# Altium PCB Roby-Eva.PcbDoc (part 1 of 2)
Units mil, origin at the board's own origin, x right, y up, seen from the top; angles counter-clockwise.
Board outline 3740.16 x 2519.69 mil, 2 copper layers (Top Layer, Bottom Layer); 61 components, 152 nets, 350 pads, 159 vias.
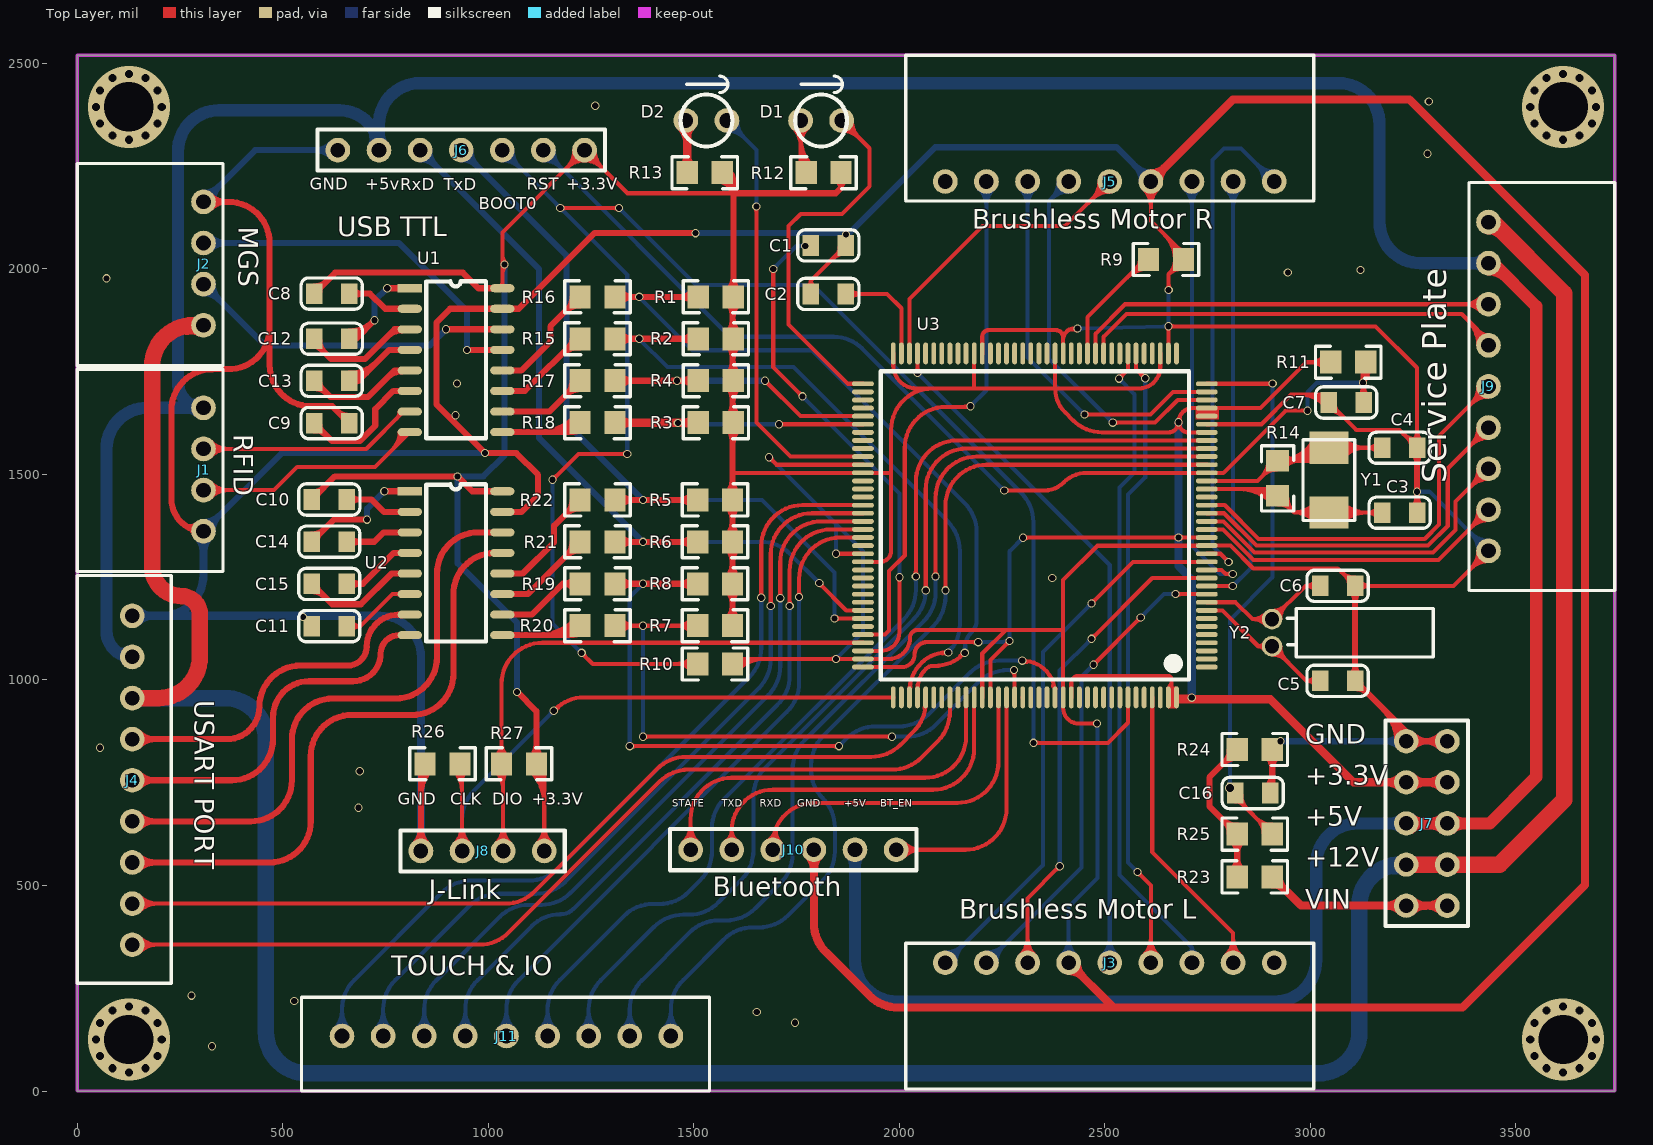
[diagram p0: Top Layer view]
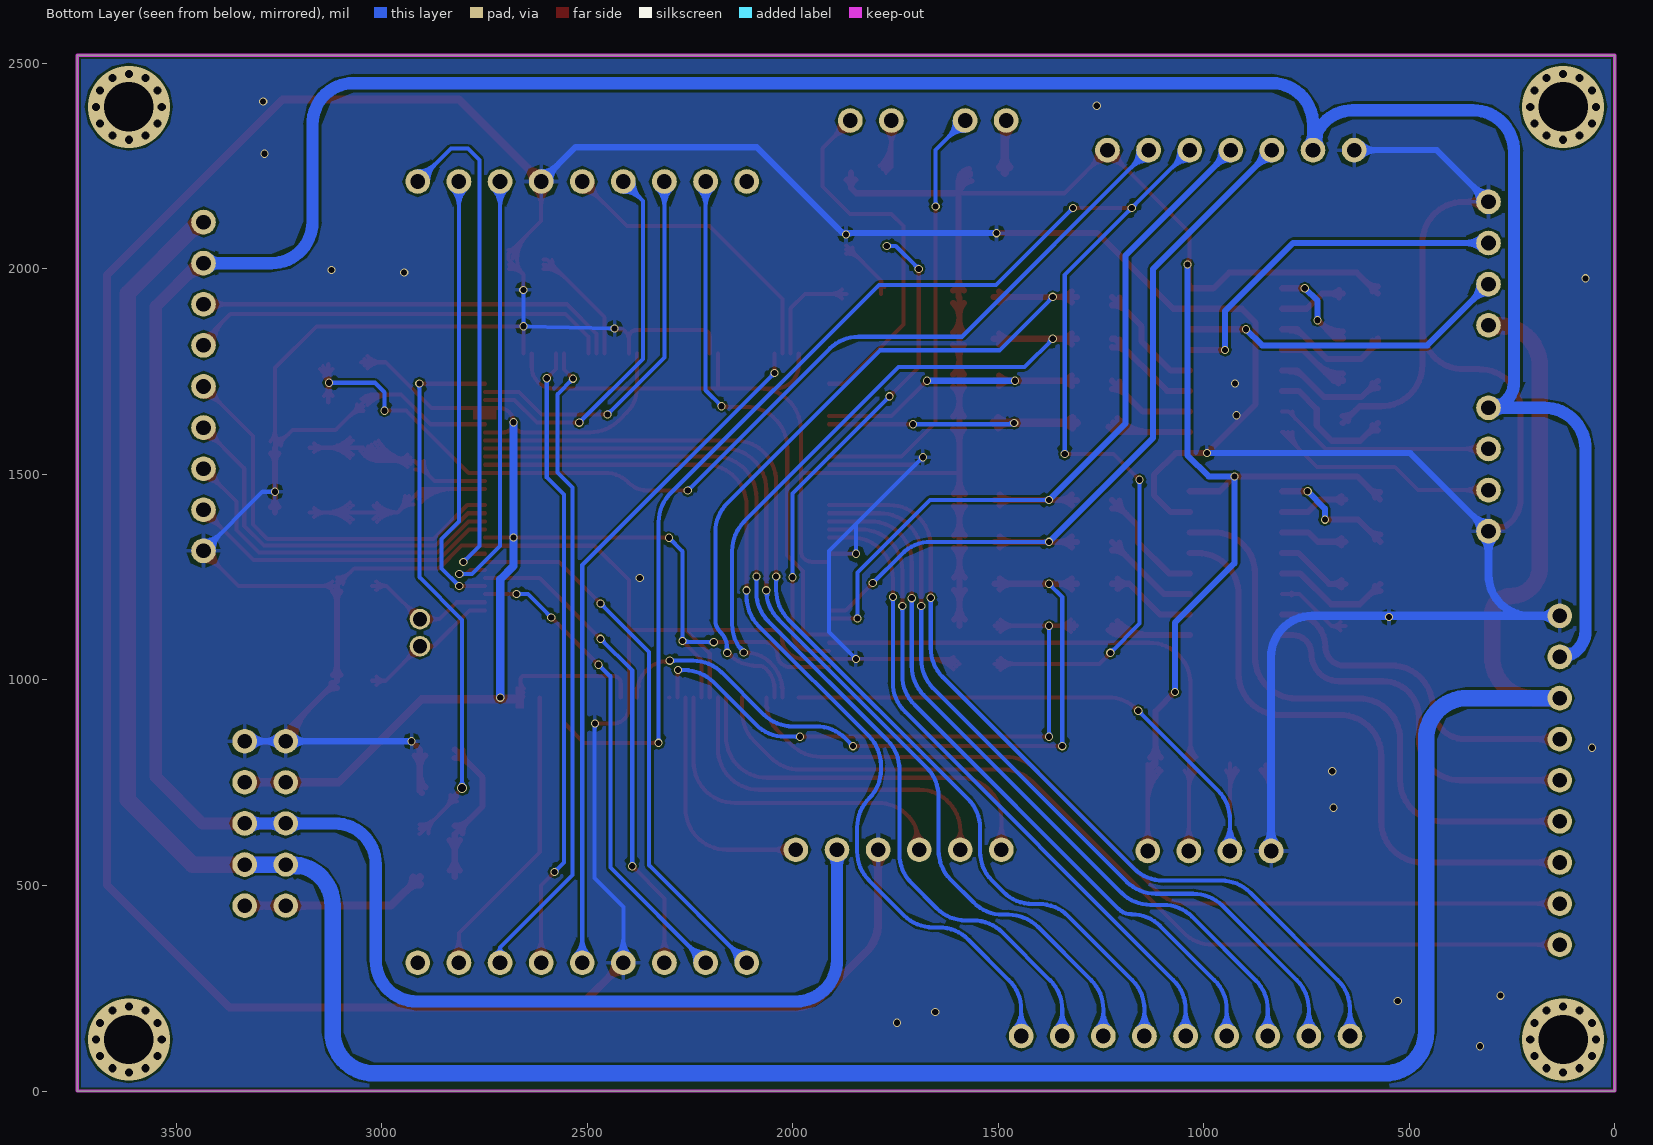
[diagram p1: Bottom Layer view, seen from below]
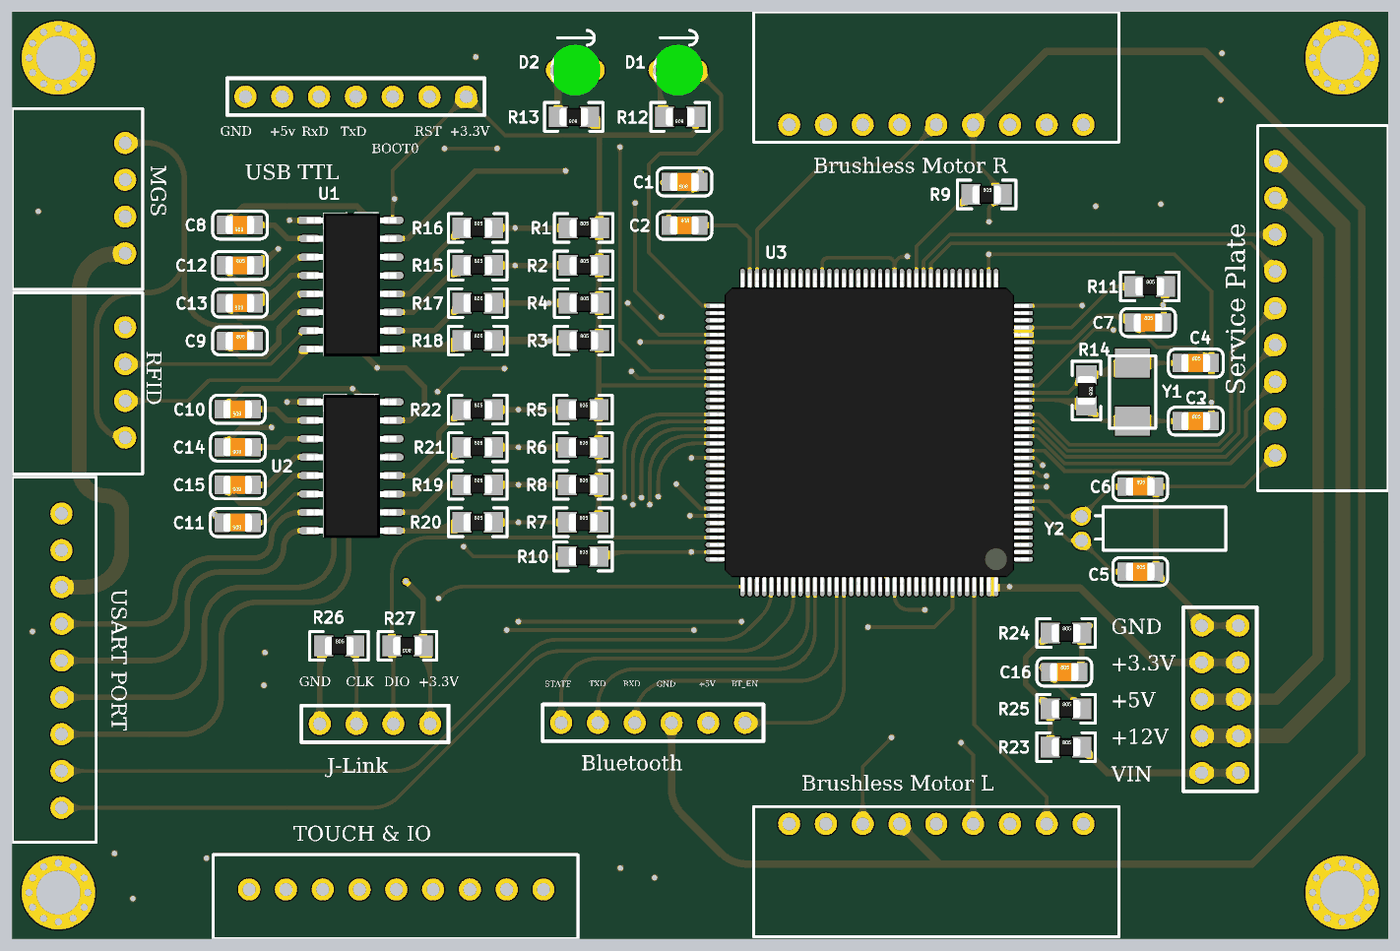
[diagram p3: 3D render of the assembled board from above, using the file's embedded part models]

## Layer stack, top to bottom
Top Layer: signal copper 1.4
Dielectric: dielectric 12.6, FR-4, Dk 4.8
Bottom Layer: signal copper 1.4

## Board outline
0,0 3740.16,0 3740.16,2519.69 0,2519.69

## Design rules (kind name [scope] priority, off if disabled: settings)
Clearance [All] p1: gap=5
ComponentClearance [All] p1: gap=5 collisioncheckmode=3 verticalgap=5 showdistances=FALSE
PolygonConnect [All] p1: connectstyle=Relief reliefconductorwidth=10 reliefentries=4 polygonreliefangle="90 Angle" airgapwidth=10
RoutingVias [All] p1: holewidth=28 width=50 viastyle="Through Hole" minholewidth=12 minwidth=15 maxholewidth=28 maxwidth=50
SolderMaskExpansion [All] p1: expansion=4
Width [All] p1: maxlimit=100 minlimit=10 preferedwidth=10
27 further rules are at their usual default settings.

## Components (designator, comment, footprint, x,y, rotation, side; value= is the part's Value field where it differs from the comment)
C1 "贴片电容0805" 0805C 1827,2057 r180 top
C2 "贴片电容0805" 0805C 1827.1,1939 r0 top
C3 "贴片电容0805" 0805C 3217,1407 r0 top
C4 "贴片电容0805" 0805C 3217,1565 r0 top
C5 "贴片电容0805" 0805C 3066,998 r0 top
C6 "贴片电容0805" 0805C 3066,1229 r0 top
C7 "贴片电容0805" 0805C 3087,1675 r0 top
C8 "贴片电容0805" 0805C 619,1940 r180 top
C9 "贴片电容0805" 0805C 619,1624.94 r0 top
C10 "贴片电容0805" 0805C 613.1,1439 r180 top
C11 "贴片电容0805" 0805C 613,1130.94 r180 top
C12 "贴片电容0805" 0805C 619.1,1830.31 r0 top
C13 "贴片电容0805" 0805C 619,1727.62 r180 top
C14 "贴片电容0805" 0805C 613,1336.31 r180 top
C15 "贴片电容0805" 0805C 613,1233.62 r180 top
C16 "贴片电容0805" 0805C 2859.5,725 r0 top
D1 "LED_DIP" LED_DIP 1809.5,2361 r0 top
D2 "LED_DIP" LED_DIP 1530.5,2361 r0 top
J1 "XH2.54-4P-L" XH2.54-4P-L 307.09,1362 r90 top
J2 "XH2.54-4P-L" XH2.54-4P-L 307.09,1863 r90 top
J3 "XH2.54-9P-L" XH2.54-9P-L 2511.74,312.09 r180 top
J4 "XH2.54-9P-D" XH2.54-9P-D 133.86,1156 r270 top
J5 "XH2.54-9P-L" XH2.54-9P-L 2511.74,2212.6 r0 top
J6 "CON7" HDR1X7H 634,2289 r90 top
J7 "CON 2x5" "CON 2X5" 3333,451 r180 top
J8 "CON4" HDR1X4H 836,584 r90 top
J9 "XH2.54-9P-L" XH2.54-9P-L 3433.07,1714 r270 top
J10 "CON6" HDR1X6H 1492,587 r90 top
J11 "XH2.54-9P-D" XH2.54-9P-D 644,133.86 r0 top
R1 "贴片电阻0805" 0805R 1511,1932 r0 top
R2 "贴片电阻0805" 0805R 1511,1829.98 r0 top
R3 "贴片电阻0805" 0805R 1511,1625.94 r0 top
R4 "贴片电阻0805" 0805R 1511,1727.96 r0 top
R5 "贴片电阻0805" 0805R 1509,1438 r0 top
R6 "贴片电阻0805" 0805R 1509,1335.98 r0 top
R7 "贴片电阻0805" 0805R 1509,1131.94 r0 top
R8 "贴片电阻0805" 0805R 1509,1233.96 r0 top
R9 "贴片电阻0805" 0805R 2606,2023 r0 top
R10 "贴片电阻0805" 0805R 1509,1039 r0 top
R11 "贴片电阻0805" 0805R 3049.4,1773 r0 top
R12 "贴片电阻0805" 0805R 1858,2234 r180 top
R13 "贴片电阻0805" 0805R 1569,2234 r180 top
R14 "贴片电阻0805" 0805R 2920,1533 r270 top
R15 "贴片电阻0805" 0805R 1223,1829.98 r0 top
R16 "贴片电阻0805" 0805R 1223,1932 r0 top
R17 "贴片电阻0805" 0805R 1223,1727.96 r0 top
R18 "贴片电阻0805" 0805R 1223,1625.94 r0 top
R19 "贴片电阻0805" 0805R 1223,1233.96 r0 top
R20 "贴片电阻0805" 0805R 1223,1131.94 r0 top
R21 "贴片电阻0805" 0805R 1223,1335.98 r0 top
R22 "贴片电阻0805" 0805R 1223,1438 r0 top
R23 "贴片电阻0805" 0805R 2821.89,521 r0 top
R24 "贴片电阻0805" 0805R 2821.89,831 r0 top
R25 "贴片电阻0805" 0805R 2821.89,625 r0 top
R26 "贴片电阻0805" 0805R 846,796 r0 top
R27 "贴片电阻0805" 0805R 1117,796 r180 top
U1 "MAX232" SOP16 809,1953 r0 top
U2 "MAX232" SOP16 809,1459 r0 top
U3 "STM32F407" LQFP144 2332,1376 r180 top
Y1 "CRYSAL_SOP_2" CRYSAL_SOP_2 3044.99,1565 r270 top
Y2 "CRYSAL_DIP_MINI" CRYSAL_DIP_MINI 3085.5,1119 r270 top

## Footprints (in the part's own frame and the unit in brackets; to place one, negate y for a bottom-side part, rotate by r counter-clockwise, add the part's x,y. Pads: shape width x height; smd on the part's side, far side on the other; paste and mask are expansions set on the pad)
0805C [mil]
  rect 40x50 smd: 1(-42.5,0) 2(42.5,0)
  silkscreen extent -75,-38 75,38, body extent -39,-25 39,25, height 30
0805R [mil]
  rect 52x56 smd: 1(0,0) 2(85,0)
  silkscreen extent -37,-39 122,39, body extent 3,-25 82,25, height 30
"CON 2X5" [mm]
  round 1.524 hole 0.9: 1(0,0) 2(0,-2.54) 3(0,-5.08) 4(0,-7.62) 5(0,-10.16)
  round 1.5 hole 0.9: 6(2.54,-10.16) 7(2.54,-7.62) 8(2.54,-5.08) 9(2.54,-2.54) 10(2.54,0)
  silkscreen extent -1.27,-11.43 3.81,1.27, body extent -1.27,-11.43 3.81,1.27, height 10
CRYSAL_DIP_MINI [mil] "晶振 小"
  round 50 hole 35: 1(-29,-179) 2(37,-179)
  silkscreen extent -55,-142 63,213, body extent -55,-189 63,212, height 122
CRYSAL_SOP_2 [mm]
  rect 2x2.4 smd: 1(0,0) 2(4,0)
  silkscreen extent -0.5,-1.6 4.5,1.6, body extent -0.48,-1.57 4.5,1.6, height 1.2
HDR1X4H [mil]
  round 60 hole 35.43: 1(0,0) 2(0,-100) 3(0,-200) 4(0,-300)
  silkscreen extent -50,-350 50,50, body extent -50,-350 50,50, height 394
HDR1X6H [mil]
  round 60 hole 35.43: 1(0,0) 2(0,-100) 3(0,-200) 4(0,-300) 5(0,-400) 6(0,-500)
  silkscreen extent -50,-550 50,50, body extent -50,-550 50,50, height 394
HDR1X7H [mil]
  round 60 hole 35.43: 1(0,0) 2(0,-100) 3(0,-200) 4(0,-300) 5(0,-400) 6(0,-500) 7(0,-600)
  silkscreen extent -50,-650 50,50, body extent -50,-650 50,50, height 394
LED_DIP [mil]
  round 60 hole 35.43: 1(-50,0) 2(50,0)
  silkscreen extent -63,-63 63,108, body extent -59,-69 69,69, height 197
LQFP144 [mm]
  oval 1.35x0.3 smd: 1(-10.563,8.75) 2(-10.563,8.25) 3(-10.562,7.75) 4(-10.563,7.25) 5(-10.562,6.75) 6(-10.562,6.25) 7(-10.562,5.75) 8(-10.563,5.25) 9(-10.563,4.75) 10(-10.563,4.25) 11(-10.562,3.75) 12(-10.562,3.25) 13(-10.562,2.75) 14(-10.562,2.25) 15(-10.562,1.75) 16(-10.562,1.25) 17(-10.562,0.75) 18(-10.562,0.25) 19(-10.562,-0.25) 20(-10.562,-0.75) 21(-10.562,-1.25) 22(-10.562,-1.75) 23(-10.562,-2.25) 24(-10.562,-2.75) 25(-10.563,-3.25) 26(-10.562,-3.75) 27(-10.562,-4.25) 28(-10.563,-4.75) 29(-10.563,-5.25) 30(-10.563,-5.75) 31(-10.563,-6.25) 32(-10.563,-6.75) 33(-10.562,-7.25) 34(-10.562,-7.75) 35(-10.562,-8.25) 36(-10.563,-8.75) 73(10.688,-8.75) 74(10.688,-8.25) 75(10.688,-7.75) 76(10.688,-7.25) 77(10.688,-6.75) 78(10.688,-6.25) 79(10.688,-5.75) 80(10.688,-5.25) 81(10.688,-4.75) 82(10.688,-4.25) 83(10.688,-3.75) 84(10.688,-3.25) 85(10.688,-2.75) 86(10.688,-2.25) 87(10.688,-1.75) 88(10.688,-1.25) 89(10.688,-0.75) 90(10.688,-0.25) 91(10.688,0.25) 92(10.688,0.75) 93(10.688,1.25) 94(10.688,1.75) 95(10.688,2.25) 96(10.688,2.75) 97(10.688,3.25) 98(10.688,3.75) 99(10.688,4.25) 100(10.688,4.75) 101(10.688,5.25) 102(10.688,5.75) 103(10.688,6.25) 104(10.688,6.75) 105(10.688,7.25) 106(10.688,7.75) 107(10.688,8.25) 108(10.688,8.75)
  oval 0.3x1.35 smd: 37(-8.688,-10.625) 38(-8.187,-10.625) 39(-7.687,-10.625) 40(-7.187,-10.625) 41(-6.687,-10.625) 42(-6.187,-10.625) 43(-5.687,-10.625) 44(-5.187,-10.625) 45(-4.687,-10.625) 46(-4.187,-10.625) 47(-3.687,-10.625) 48(-3.187,-10.625) 49(-2.687,-10.625) 50(-2.187,-10.625) 51(-1.687,-10.625) 52(-1.187,-10.625) 53(-0.687,-10.625) 54(-0.187,-10.625) 55(0.313,-10.625) 56(0.813,-10.625) 57(1.313,-10.625) 58(1.813,-10.625) 59(2.313,-10.625) 60(2.813,-10.625) 61(3.313,-10.625) 62(3.813,-10.625) 63(4.313,-10.625) 64(4.813,-10.625) 65(5.313,-10.625) 66(5.813,-10.625) 67(6.313,-10.625) 68(6.813,-10.625) 69(7.313,-10.625) 70(7.813,-10.625) 71(8.313,-10.625) 72(8.813,-10.625) 109(8.813,10.625) 110(8.313,10.625) 111(7.813,10.625) 112(7.313,10.625) 113(6.812,10.625) 114(6.313,10.625) 115(5.813,10.625) 116(5.312,10.625) 117(4.812,10.625) 118(4.313,10.625) 119(3.813,10.625) 120(3.313,10.625) 121(2.813,10.625) 122(2.313,10.625) 123(1.813,10.625) 124(1.313,10.625) 125(0.813,10.625) 126(0.313,10.625) 127(-0.187,10.625) 128(-0.687,10.625) 129(-1.187,10.625) 130(-1.687,10.625) 131(-2.187,10.625) 132(-2.687,10.625) 133(-3.187,10.625) 134(-3.688,10.625) 135(-4.187,10.625) 136(-4.687,10.625) 137(-5.188,10.625) 138(-5.687,10.625) 139(-6.187,10.625) 140(-6.687,10.625) 141(-7.187,10.625) 142(-7.687,10.625) 143(-8.188,10.625) 144(-8.688,10.625)
  silkscreen extent -9.46,-9.53 9.59,9.52, body extent -10.94,-11 11.06,11, height 1.6
SOP16 [mm]
  rect 1.5x0.5 smd: 1(0,0)
  oval 1.5x0.5 smd: 2(0,-1.27) 3(0,-2.54) 4(0,-3.81) 5(0,-5.08) 6(0,-6.35) 7(0,-7.62) 8(0,-8.89) 9(5.715,-8.89) 10(5.715,-7.62) 11(5.715,-6.35) 12(5.715,-5.08) 13(5.715,-3.81) 14(5.715,-2.54) 15(5.715,-1.27) 16(5.715,0)
  silkscreen extent 1.02,-9.27 4.7,0.43, body extent -0.21,-9.4 5.97,0.5, height 1.7
XH2.54-4P-L [mil]
  round 60 hole 35.43: 1(0,0) 2(100,0) 3(200,0) 4(300,0)
  silkscreen extent -98,-47 394,307, body extent -96,-11 396,304, height 224
XH2.54-9P-D [mil]
  round 60 hole 35.43: 1(0,0) 2(100,0) 3(200,0) 4(300,0) 5(400,0) 6(500,0) 7(600,0) 8(700,0) 9(800,0)
  silkscreen extent -98,-134 894,94
XH2.54-9P-L [mil] "2.54"
  round 60 hole 35.43: 1(-400,0) 2(-300,0) 3(-200,0) 4(-100,0) 5(0,0) 6(100,0) 7(200,0) 8(300,0) 9(400,0)
  silkscreen extent -496,-47 496,307, body extent -494,-10 494,305, height 224

## Via types
v1: diameter 20, hole 15, Top Layer to Bottom Layer, 106 vias
v2: diameter 19.68, hole 19.68, Top Layer to Bottom Layer, 48 vias
v3: diameter 200, hole 120, Top Layer to Bottom Layer, 4 vias
v4: diameter 25, hole 20, Top Layer to Bottom Layer, 1 vias

## Nets (pads, with @x,y where several pads share a name; then routed paths per layer and width w, separated by ;. In a path a pad name is that pad's centre, name@x,y a point inside that pad or via, vN(x,y) a via of type N, cw(c..) or ccw(c..) an arc to the next point about the centre after c; other vN are vias at no path point)
+3.3V: C8.2 C10.2 J6.7 J7.4 J7.7 J8.4 R1.2 R2.2 R3.2 R4.2 R5.2 R6.2 R7.2 R8.2 R11.1 R12.1 R13.1 R27.1 U1.16 U2.16 U3.17 U3.30 U3.32 U3.33 U3.39 U3.52 U3.62 U3.72 U3.84 U3.95 U3.108 U3.121 U3.131 U3.143 U3.144 | length 13562.4
  Top Layer w10: U1.16@1030.58,1956.42 ccw(c1022.31,1964.69) 1034,1964.69 ccw(c1045.69,1964.69) U1.16@1037.42,1956.42 ; U1.16@1034,1953 1034,2089 J6.7@1234,2289 1339,2184 1596,2184 ; 1034,1986.86 cw(c1063.14,1986.86) v1@1042.54,2007.46 ; 1034,2035.14 ccw(c1063.14,2035.14) v1@1042.54,2014.54 ; R27.1@1102.15,779.15 cw(c1020.43,697.43) 1136,697.43 ; R27.1@1109.22,786.22 cw(c1044.57,721.57) 1136,721.57 ; R27.1@1116.29,793.29 cw(c1068.72,745.72) 1136,745.72 ; J8.4@1118.32,601.68 ccw(c1075.64,644.36) 1136,644.36 ccw(c1196.36,644.36) J8.4@1153.68,601.68 ; R27.1@1123.36,800.36 cw(c1092.86,769.86) R27.1@1136,769.86 ; J8.4@1125.39,594.61 ccw(c1099.79,620.21) 1136,620.21 ccw(c1172.21,620.21) J8.4@1146.61,594.61 ; J8.4@1136,584 R27.1@1136,796 ; J6.7@1209,2289 cw(c1148.64,2289) 1191.32,2246.32 cw(c1234,2203.64) 1234,2264 cw(c1234,2203.64) 1276.68,2246.32 cw(c1319.36,2289) J6.7@1259,2289 ; J6.7@1219,2289 cw(c1182.79,2289) 1208.39,2263.39 cw(c1234,2237.79) 1234,2274 cw(c1234,2237.79) 1259.61,2263.39 cw(c1285.21,2289) J6.7@1249,2289 ; 1594,1495 cw(c1602.95,1495) 1602.95,1503.95 U3.84@1911.23,1503.95 1980,1503.95 ; U3.108@1911.23,1031.51 2006.51,1031.51 ccw(c2006.51,1062) 2037,1062 cw(c2067,1062) 2067,1092 v1(2192,1092) ; U3.95@1911.23,1287.42 1953.42,1287.42 ccw(c1953.42,1314) 1980,1314 1980,1503.95 ; U3.72@1985.05,1794.31 1985.05,1765.95 ccw(c2042,1765.95) 2042,1709 2080,1709 ; U3.62@2181.9,1794.31 2181.9,1709 ; v1@2188.46,1088.46 ccw(c2179.93,1079.93) 2179.93,1092 ccw(c2179.93,1104.07) v1@2188.46,1095.54 ; U3.121@2221.27,957.69 2221.27,1048.27 v1(2268,1095) ; v1@2263,1095 cw(c2250.93,1095) 2259.46,1086.46 cw(c2268,1077.93) v1@2268,1090 ; v1@2301,1346.47 v1(2679,1346.47) U3.17@2747.85,1346.47 ; v1@2304.54,1342.46 cw(c2314.21,1332.79) 2314.21,1346.47 ; v1@2304.54,1349.54 ccw(c2311.93,1356.93) 2311.93,1346.47 ; U3.52@2378.75,1794.31 2378.75,1709 ; U3.131@2418.12,957.69 2418.12,992.12 cw(c2436,992.12) 2436,1010 2652,1010 cw(c2652,1000) 2662,1000 2662,969.72 ccw(c2674.03,969.72) U3.144@2674.03,957.69 ; U3.39@2634.66,1794.31 2634.66,1761.66 cw(c2582,1761.66) 2582,1709 2378.75,1709 ; U3.143@2653.7,979 ccw(c2633.67,999.03) 2662,999.03 ; U3.143@2654.33,979.27 ccw(c2654.26,987) 2662,987 ; U3.143@2654.43,969.27 ccw(c2654.36,976.91) 2662,976.91 ; U3.143@2654.52,959.27 ccw(c2654.45,966.82) 2662,966.82 ; v1@2674.67,1624.5 cw(c2664.22,1618.46) 2675.88,1615.34 cw(c2687.54,1612.22) v1@2681.5,1622.67 ; v1@2675.46,1342.94 ccw(c2666.93,1334.4) 2666.93,1346.47 ccw(c2666.93,1358.54) v1@2675.46,1350.01 ; v1@2676.5,1622.67 cw(c2670.46,1612.22) 2682.12,1615.34 cw(c2693.78,1618.46) v1@2683.33,1624.5 ; v1@2676.5,1631.33 ccw(c2670.46,1641.78) 2682.12,1638.66 ccw(c2693.78,1635.54) v1@2683.33,1629.5 ; v1@2682.54,1342.94 cw(c2691.07,1334.4) 2691.07,1346.47 cw(c2691.07,1358.54) v1@2682.54,1350.01 ; U3.30@2747.85,1602.38 2703.62,1602.38 cw(c2703.62,1627) v1(2679,1627) ; U3.32@2747.85,1641.75 U3.33@2747.85,1661.43 ; R11.1@3034.55,1758.15 ccw(c2998.7,1722.3) 2998.7,1773 ccw(c2998.7,1823.7) R11.1@3034.55,1787.85 ; R11.1@3041.62,1765.22 ccw(c3022.84,1746.44) 3022.84,1773 ccw(c3022.84,1799.56) R11.1@3041.62,1780.78 ; R11.1@3049.4,1773 2990,1773 2878.43,1661.43 U3.33@2747.85,1661.43 ; 1980,1503.95 1980,1609 cw(c2080,1609) 1985.05,1640.38 cw(c2080,1609) 2080,1709 ; 2080,1709 2181.9,1709 ; 2181.9,1709 2378.75,1709 ; 2378.75,1709 ccw(c2460.24,1709) 2402.62,1651.38 2422.33,1631.67 ccw(c2493.04,1702.38) 2493.04,1602.38 2654.38,1602.38 ccw(c2654.38,1627) v1(2679,1627) ; v1(2679,1627) cw(c2713.43,1627) 2713.43,1661.43 U3.33@2747.85,1661.43
  Top Layer w15: C10.2@570.6,1439 626.6,1495 v1(925,1495) 961,1459 U2.16@1034,1459 ; C10.2@570.6,1456.5 ccw(c570.6,1498.75) 600.48,1468.87 ; C8.2@576.5,1940 627.5,1991 938,1991 976,1953 U1.16@1034,1953 ; C8.2@576.5,1957.5 ccw(c576.5,1999.75) 606.37,1969.87 ; C10.2@583.1,1444 cw(c601.21,1444) C10.2@588.41,1456.8 ; C8.2@589,1945 cw(c607.11,1945) C8.2@594.3,1957.8 ; v1(1070,971) 1117,924 R27.1@1117,796 ; R27.1@1103.92,811.08 ccw(c1072.34,842.66) 1117,842.66 ccw(c1161.66,842.66) R27.1@1130.08,811.08 ; R13.1@1565.51,2213.83 cw(c1558.42,2176.93) 1596,2176.93 ; R13.1@1568.34,2228.56 cw(c1561.91,2195.08) 1596,2195.08 ; R13.1@1569,2234 1596,2207 ; R13.1@1571.17,2243.29 cw(c1565.4,2213.24) 1596,2213.24 ; R13.1@1572.81,2213.9 cw(c1578.04,2189.04) 1596,2207 ; R7.2@1580.92,1147.02 ccw(c1549.34,1178.6) 1594,1178.6 ccw(c1638.66,1178.6) R7.2@1607.08,1147.02 ; R8.2@1580.92,1218.88 cw(c1549.34,1187.29) 1594,1187.29 cw(c1638.66,1187.29) R8.2@1607.08,1218.88 ; R8.2@1580.92,1249.04 ccw(c1549.34,1280.62) 1594,1280.62 ccw(c1638.66,1280.62) R8.2@1607.08,1249.04 ; R6.2@1580.92,1320.9 cw(c1549.34,1289.32) 1594,1289.32 cw(c1638.66,1289.32) R6.2@1607.08,1320.9 ; R6.2@1580.92,1351.06 ccw(c1549.34,1382.64) 1594,1382.64 ccw(c1638.66,1382.64) R6.2@1607.08,1351.06 ; R5.2@1580.92,1422.92 cw(c1549.34,1391.34) 1594,1391.34 cw(c1638.66,1391.34) R5.2@1607.08,1422.92 ; R5.2@1580.92,1453.08 ccw(c1549.34,1484.66) 1594,1484.66 ccw(c1638.66,1484.66) R5.2@1607.08,1453.08 ; R3.2@1582.92,1610.86 cw(c1556.16,1584.1) 1594,1584.1 ; R3.2@1582.92,1641.02 ccw(c1556.16,1667.77) 1594,1667.77 ; R4.2@1582.92,1712.88 cw(c1556.16,1686.12) 1594,1686.12 ; R4.2@1582.92,1743.04 ccw(c1556.16,1769.79) 1594,1769.79 ; R2.2@1582.92,1814.9 cw(c1556.17,1788.14) 1594,1788.14 ; R2.2@1582.92,1845.06 ccw(c1556.17,1871.81) 1594,1871.81 ; R1.2@1582.92,1916.92 cw(c1556.16,1890.16) 1594,1890.16 ; R1.2@1582.92,1947.08 ccw(c1551.34,1978.66) 1596,1978.66 ccw(c1640.66,1978.66) R1.2@1609.08,1947.08 ; R13.1@1587.43,2230.44 ccw(c1616.93,2227.93) 1596,2207 ; R7.2@1594,1131.94 R8.2@1594,1233.96 R6.2@1594,1335.98 R5.2@1594,1438 1594,1495 1594,1930 R1.2@1596,1932 1596,2184 ; 1594,1574.45 cw(c1645.49,1574.45) R3.2@1609.08,1610.86 ; 1594,1676.47 cw(c1645.49,1676.47) R4.2@1609.08,1712.88 ; 1594,1677.43 ccw(c1645.49,1677.43) R3.2@1609.08,1641.02 ; 1594,1778.49 cw(c1645.49,1778.49) R2.2@1609.08,1814.9 ; 1594,1779.45 ccw(c1645.49,1779.45) R4.2@1609.08,1743.04 ; 1594,1880.51 cw(c1645.49,1880.51) R1.2@1609.08,1916.92 ; 1594,1881.47 ccw(c1645.49,1881.47) R2.2@1609.08,1845.06 ; R12.1@1847.58,2216.71 cw(c1834.14,2197) 1858,2197 ; R12.1@1858,2234 1858,2197 ; R12.1@1868.42,2216.71 ccw(c1881.86,2197) 1858,2197 ; U3.144@2674.03,957.69 v1@2711,957.69 ; 1596,2184 1596,2207 ; 1596,2184 1845,2184 1858,2197
  Top Layer w20: 2663,953 2903,953 3105,751 J7.7@3233,751 J7.4@3333,751 ; 2701.34,953 ccw(c2701.34,966.66) v1(2711,957) ccw(c2720.66,966.66) 2720.66,953 ; J7.7@3219.19,737.19 ccw(c3185.86,703.86) 3185.86,751 ccw(c3185.86,798.14) J7.7@3219.19,764.81 ; J7.7@3246.81,737.19 cw(c3280.14,703.86) 3280.14,751 cw(c3280.14,798.14) J7.7@3246.81,764.81 ; J7.4@3318.86,736.86 ccw(c3284.72,702.72) 3284.72,751 ccw(c3284.72,799.28) J7.4@3318.86,765.14
  Bottom Layer w10: v1(2192,1092) 2260.76,1092 ccw(c2260.76,1102.24) v1(2268,1095) 2268,1313 v1(2301,1346) ; v1@2195.54,1088.46 cw(c2204.07,1079.93) 2204.07,1092 cw(c2204.07,1104.07) v1@2195.54,1095.54 ; 2248.69,1092 ccw(c2248.69,1114.31) 2264.46,1098.54 ccw(c2255.93,1107.07) 2268,1107.07 ccw(c2280.07,1107.07) v1@2271.54,1098.54 ; v1@2296,1346 cw(c2283.93,1346) 2292.46,1337.46 cw(c2301,1328.93) v1@2301,1341
  Bottom Layer w15: v1(1039,2011) 1039,1546 988,1495 v1(925,1495) 925,1284 1070,1139 v1(1070,971)
  Bottom Layer w20: v1(2679,1627) v1(2679,1346.47) 2679,1277 2711,1245 v1(2711,957)
+5V: J1.4 J4.2 J6.2 J7.3 J7.8 J9.2 J10.5 | length 9813.3
  Top Layer w30: J7.8@3233,651 J7.3@3333,651 3436,651 3549,764 3549,1909 J9.2@3444,2014 ; J7.8@3243.27,640.73 cw(c3268.07,615.93) 3268.07,651 cw(c3268.07,686.07) J7.8@3243.27,661.27 ; J7.3@3322.39,640.39 ccw(c3296.79,614.79) 3296.79,651 ccw(c3296.79,687.21) J7.3@3322.39,661.61 ; J7.3@3343.61,640.39 cw(c3369.21,614.79) 3369.21,651 cw(c3369.21,687.21) J7.3@3343.61,661.61 ; J9.2@3433.07,1999 cw(c3433.07,1936.4) 3477.33,1980.67
  Bottom Layer w30: J4.2@120.32,1049.54 ccw(c95.24,1037.58) 102.43,1064.42 ccw(c109.62,1091.26) J4.2@125.36,1068.36 ; J4.2@133.86,1056 cw(c133.86,1118.86) 71,1118.86 71,1562 cw(c171,1562) 171,1662 J1.4@307.09,1662 cw(c307.09,1724.09) 245,1724.09 245,2286 cw(c345,2286) 345,2386 637,2386 cw(c637,2289) J6.2@734,2289 734,2352 cw(c834,2352) 834,2452 3068,2452 cw(c3068,2352) 3168,2352 3168,2114 ccw(c3268,2114) 3268,2014 J9.2@3444,2014 ; J1.4@293.49,1655.67 ccw(c269.08,1644.31) 276.04,1670.32 ccw(c283.01,1696.33) J1.4@298.47,1674.28 ; J1.4@296.48,1651.39 ccw(c270.87,1625.79) 270.87,1662 ccw(c270.87,1698.21) J1.4@296.48,1672.61 ; J6.2@721.01,2296.5 ccw(c689.65,2314.61) 724.63,2323.98 ccw(c759.61,2333.35) J6.2@741.5,2301.99 ; J6.2@723.39,2299.61 ccw(c697.79,2325.21) 734,2325.21 ccw(c770.21,2325.21) J6.2@744.61,2299.61 ; J10.5@1881.39,576.39 cw(c1855.79,550.79) 1892,550.79 cw(c1928.21,550.79) J10.5@1902.61,576.39 ; J10.5@1892,587 1892,318 ccw(c1992,318) 1992,218 2914,218 ccw(c2914,318) 2970.47,235.47 ccw(c2914,318) 2996.53,261.53 ccw(c2914,318) 3014,318 3014,551 cw(c3114,551) 3114,651 J7.8@3233,651 J7.3@3333,651 ; J7.8@3222.73,640.73 ccw(c3197.93,615.93) 3197.93,651 ccw(c3197.93,686.07) J7.8@3222.73,661.27 ; J7.8@3243.27,640.73 cw(c3268.07,615.93) 3268.07,651 cw(c3268.07,686.07) J7.8@3243.27,661.27 ; J7.3@3322.39,640.39 ccw(c3296.79,614.79) 3296.79,651 ccw(c3296.79,687.21) J7.3@3322.39,661.61 ; J9.2@3422.46,2003.39 ccw(c3396.86,1977.79) 3396.86,2014 ccw(c3396.86,2050.21) J9.2@3422.46,2024.61
+12V: J2.1 J4.3 J7.2 J7.9 J9.1 | length 7655.6
  Top Layer w40: J4.3@133.86,956 198,956 ccw(c198,1056) 298,1056 298,1160 ccw(c254,1160) 254,1204 cw(c254,1276) 182,1276 182,1763 cw(c282,1763) 282,1863 J2.1@307.09,1863 ; 266.95,1858.97 cw(c278.93,1814.23) J2.1@302.09,1854.34 ; J7.9@3233,551 J7.2@3333,551 3460,551 3617,708 3617,1941 J9.1@3444,2114 ; J9.1@3433.07,2104 cw(c3433.07,2053.47) 3468.8,2089.2
  Bottom Layer w40: J4.3@133.86,956 359,956 cw(c359,856) 459,856 459,143 ccw(c559,143) 559,43 3019,43 ccw(c3019,143) 3119,143 3119,451 cw(c3219,451) 3219,551 J7.9@3233,551 J7.2@3333,551 ; 3201.39,546.28 cw(c3210.55,512.12) J7.9@3228.24,542.75
ADC123_IN2: C16.1 R25.2 U3.36 | length 1570.2
  Top Layer w10: U3.36@2747.85,1720.49 v1@2907,1720.49 ; C16.1@2817,705 cw(c2817,681.11) 2833.89,698 ; C16.1@2817,725 2817,714.89 R25.2@2906.89,625 ; C16.1@2822,720 ccw(c2846.4,720) C16.1@2829.15,702.75 ; C16.1@2832,720 ccw(c2880.54,720) 2846.22,685.68 ; 2867.63,664.26 ccw(c2906.89,703.53) R25.2@2906.89,648 ; 2872.46,659.44 cw(c2840.02,627) R25.2@2885.89,627 ; R25.2@2884.7,647.19 ccw(c2906.89,669.38) R25.2@2906.89,638 ; 2894.69,1720.49 ccw(c2894.69,1734.31) v1@2904.46,1724.54 ; 2897.16,1720.49 cw(c2897.16,1710.16) v1@2904.46,1717.46
  Bottom Layer w10: v4@2798.7,742.3 ccw(c2785.89,755.11) 2804,755.11 ccw(c2822.11,755.11) v4@2809.3,742.3 ; v4(2804,737) 2804,1146 2908,1250 v1(2908,1721) ; v1@2904.46,1717.46 cw(c2895.93,1708.93) 2908,1708.93 cw(c2920.07,1708.93) v1@2911.54,1717.46
AGND: C1.1 C2.1 C3.2 C4.2 C5.2 C6.2 C7.1 C9.2 C11.2 C16.2 J1.1 J2.4 J3.6 J4.1 J5.6 J6.1 J7.5 J7.6 J8.1 J9.9 J10.4 R9.2 R10.2 R24.2 R26.1 U1.15 U2.15 U3.16 U3.31 U3.38 U3.51 U3.61 U3.83 U3.94 U3.107 U3.120 U3.130 | length 24511.2
  Top Layer w10: R10.2@1594,1039 1606.2,1051.2 v1(1845.9,1051.2) U3.107@1911.23,1051.2 1974.2,1051.2 ccw(c1974.2,1103) 2026,1103 cw(c2045,1103) 2045,1122 2398.44,1122 ; R10.2@1594.71,1040.29 cw(c1621.03,1013.97) 1621.03,1051.2 ; R10.2@1601.78,1033.22 cw(c1645.17,989.83) 1645.17,1051.2 ; R10.2@1608.85,1026.15 cw(c1669.32,965.68) 1669.32,1051.2 ; R10.2@1608.85,1055.85 ccw(c1620.08,1067.08) 1620.08,1051.2 ; v1@1683,1537 cw(c1683,1524.93) 1691.54,1533.46 cw(c1700.07,1542) v1@1688,1542 ; v1(1683,1542) 1701.36,1523.64 U3.83@1911.23,1523.64 ; C2.1@1776.26,1956.46 ccw(c1765.78,1972.1) 1784.6,1972.1 ; C2.1@1784.6,1939 1784.6,1972.1 ; C2.1@1792.95,1956.46 cw(c1803.43,1972.1) 1784.6,1972.1 ; 1835.36,2022.86 cw(c1869.5,1988.72) C1.1@1869.5,2037 ; v1@1842.36,1047.66 ccw(c1833.83,1039.13) 1833.83,1051.2 ccw(c1833.83,1063.27) v1@1842.36,1054.73 ; v1(1845.9,1307.1) U3.94@1911.23,1307.1 ; 1847.43,2034.93 ccw(c1830.36,2052) C1.1@1854.5,2052 ; v1@1849.43,1047.66 cw(c1857.97,1039.13) 1857.97,1051.2 cw(c1857.97,1063.27) v1@1849.43,1054.73 ; v1@1849.43,1303.57 cw(c1857.97,1295.03) 1857.97,1307.1 cw(c1857.97,1319.17) v1@1849.43,1310.64 ; C1.1@1852.43,2039.93 cw(c1869.5,2022.86) C1.1@1869.5,2047 ; C1.1@1869.5,2057 1784.6,1972.1 ; U3.120@2201.59,957.69 2201.59,1064.59 2259,1122 ; U3.61@2201.59,1794.31 2201.59,1835.59 cw(c2217,1835.59) 2217,1851 2381,1851 cw(c2381,1834) 2398,1834 2398,1794.31 U3.51@2398.44,1794.31 2398.44,1828.44 cw(c2425,1828.44) 2425,1855 v1(2433,1855) ; 2415.98,1852.58 cw(c2420.93,1834.09) v1@2430.5,1850.67 ; v1@2477.46,890.46 ccw(c2468.93,881.93) 2468.93,894 ccw(c2468.93,906.07) v1@2477.46,897.54 ; v1(2481,894) 2436,894 cw(c2436,931.56) 2398.44,931.56 U3.130@2398.44,957.69 2398.44,1122 ; J5.6@2594.06,2194.92 cw(c2551.38,2152.24) 2611.74,2152.24 cw(c2672.1,2152.24) J5.6@2629.42,2194.92 ; J5.6@2601.13,2201.99 cw(c2575.53,2176.39) 2611.74,2176.39 cw(c2647.95,2176.39) J5.6@2622.35,2201.99 ; J5.6@2611.74,2212.6 2611.74,2116.26 2691,2037 R9.2@2691,2023 2655,1987 ; 2646.67,2081.33 cw(c2590.33,2025) R9.2@2670,2025 ; v1@2650.81,1856.81 cw(c2642.27,1848.27) 2654.34,1848.27 cw(c2666.41,1848.27) 2657.88,1856.81 cw(c2666.41,1848.27) 2666.41,1860.34 cw(c2666.41,1872.41) v1@2657.88,1863.88 ; v1@2651.46,1952.54 ccw(c2642.93,1961.07) 2655,1961.07 ccw(c2667.07,1961.07) v1@2658.54,1952.54 ; U3.38@2654.34,1794.31 v1(2654.34,1860.34) 3158.66,1860.34 3259.5,1759.5 C4.2@3259.5,1565 3216.5,1608 3111.5,1608 C7.1@3044.5,1675 3025.5,1694 2953,1694 2881.06,1622.06 U3.31@2747.85,1622.06 ; v1(2655,1949) 2655,1987 ; 2656.56,1988.56 ccw(c2624.13,2021) R9.2@2670,2021 ; 2663.74,2064.26 cw(c2624.47,2025) R9.2@2680,2025 ; R9.2@2670.62,2002.62 cw(c2688.63,1984.6) R9.2@2690.28,2010.02 ; 2675.64,2052.36 ccw(c2691,2067.73) R9.2@2691,2046 ; R9.2@2689.63,2000.04 ccw(c2686.72,1955.29) 2655,1987 ; 2974.49,1694 cw(c2974.49,1609.99) C7.1@3033.89,1669.39 ; 2998.63,1694 cw(c2998.63,1634.13) C7.1@3040.96,1676.46 ; 3022.77,1694 cw(c3022.77,1658.27) C7.1@3048.04,1683.54 ; C7.1@3044.5,1655 cw(c3044.5,1606.72) 3078.64,1640.86 ; C7.1@3044.5,1665 cw(c3044.5,1640.86) C7.1@3061.57,1657.93 ; C7.1@3059.5,1670 ccw(c3083.64,1670) 3066.57,1652.93 ; 3074.36,1263.14 ccw(c3108.5,1297.28) C6.2@3108.5,1249 ; 3086.43,1251.07 cw(c3069.36,1234) C6.2@3093.5,1234 ; C6.2@3091.43,1246.07 ccw(c3108.5,1263.14) C6.2@3108.5,1239 ; C6.2@3119.11,1218.39 cw(c3144.71,1192.79) 3144.71,1229 cw(c3144.71,1265.21) C6.2@3119.11,1239.61 ; 3225.36,1599.14 ccw(c3259.5,1633.28) C4.2@3259.5,1585 ; 3237.43,1587.07 cw(c3220.36,1570) C4.2@3244.5,1570 ; C4.2@3242.43,1582.07 ccw(c3259.5,1599.14) C4.2@3259.5,1575 ; C4.2@3248.89,1580.61 ccw(c3223.29,1606.21) 3259.5,1606.21 ccw(c3295.71,1606.21) C4.2@3270.11,1580.61 ; J9.9@3408.07,1314 cw(c3347.72,1314) 3390.39,1271.32 cw(c3433.07,1228.64) J9.9@3433.07,1289 ; J9.9@3418.07,1314 cw(c3381.86,1314) 3407.46,1288.39 cw(c3433.07,1262.79) J9.9@3433.07,1299 ; J9.9@3433.07,1314 3348.07,1229 C6.2@3108.5,1229 3066.5,1271 2860.79,1271 2805,1326.79 U3.16@2747.85,1326.79 2747.53,1326.47 2481.47,1326.47 2398.44,1243.44 2398.44,1122
  Top Layer w15: J1.1@285.55,1355.5 ccw(c261.56,1348.26) 268.05,1372.46 ccw(c274.53,1396.66) J1.1@291.68,1378.4 ; J1.1@307.09,1362 cw(c307.09,1440.09) 229,1440.09 229,1656 cw(c329,1656) 236.86,1694.86 cw(c329,1656) 290.14,1748.14 cw(c329,1656) 309.1,1754 cw(c329,1656) 329,1756 329,1756.32 376,1756.32 ccw(c368,1856) 468,1856 ; J2.4@307.09,2163 368,2163 cw(c368,2063) 468,2063 468,1856 ; J2.4@323,2147.09 cw(c361.41,2108.68) 361.41,2163 cw(c361.41,2217.32) J2.4@323,2178.91 ; 631.63,1654.81 ccw(c661.5,1684.69) C9.2@661.5,1642.44 ; C9.2@643.7,1642.74 cw(c630.89,1629.94) C9.2@649,1629.94 ; C9.2@661.5,1624.94 620.44,1666 568,1666 cw(c568,1766) 468,1766 468,1856 ; J8.1@820.09,599.91 ccw(c781.68,638.32) 836,638.32 ccw(c890.32,638.32) J8.1@851.91,599.91 ; J8.1@836,584 R26.1@836,806 ; 836,725.19 cw(c914.81,725.19) R26.1@859.08,780.92 ; 836,761.41 cw(c878.59,761.41) R26.1@848.47,791.53 ; U2.15@1034,1409 1081,1409 1121,1449 1121,1499 1068,1552 v1(992,1552) 874,1670 874,1870 907,1903 U1.15@1034,1903 1074,1903 1258,2087 v1(1504,2087) ; C16.2@2893.16,738.84 ccw(c2860,771.99) 2906.89,771.99 ; R24.2@2893.81,815.92 cw(c2862.23,784.34) 2906.89,784.34 cw(c2951.56,784.34) R24.2@2919.98,815.92 ; C16.2@2902,725 2906.89,729.89 R24.2@2906.89,831 v1(2926.89,851) ; C5.2@3099.66,1011.84 ccw(c3078.32,1033.18) 3108.5,1033.18 ccw(c3138.68,1033.18) C5.2@3117.34,1011.84 ; C6.2@3099.66,1215.16 cw(c3078.32,1193.82) 3108.5,1193.82 cw(c3138.68,1193.82) C6.2@3117.34,1215.16 ; C5.2@3108.5,980.5 cw(c3108.5,938.25) 3138.37,968.13 ; C6.2@3108.5,1229 C5.2@3108.5,998 3233,873.5 J7.6@3233,851 J7.5@3333,851 ; C5.2@3121,993 ccw(c3139.11,993) C5.2@3126.3,980.2 ; 3179.49,927.01 cw(c3103.47,851) J7.6@3210.97,851 ; 3205.09,901.41 cw(c3154.69,851) J7.6@3225.97,851 ; J7.6@3248.58,835.42 cw(c3286.18,797.82) 3286.18,851 cw(c3286.18,904.18) J7.6@3248.58,866.58 ; C3.2@3250.66,1420.84 ccw(c3229.32,1442.18) 3259.5,1442.18 ccw(c3289.68,1442.18) C3.2@3268.34,1420.84 ; C4.2@3250.66,1551.16 cw(c3229.32,1529.82) 3259.5,1529.82 cw(c3289.68,1529.82) C4.2@3268.34,1551.16 ; C3.2@3259.5,1407 v1(3259.5,1458) C4.2@3259.5,1565 ; J7.5@3317.09,835.09 ccw(c3278.68,796.68) 3278.68,851 ccw(c3278.68,905.32) J7.5@3317.09,866.91
  Top Layer w20: J10.4@1777.86,572.86 cw(c1743.72,538.72) 1792,538.72 cw(c1840.28,538.72) J10.4@1806.14,572.86 ; J10.4@1792,587 1792,408.42 ccw(c1892,408.42) 1821.29,337.71 1926.71,232.29 ccw(c1997.42,303) 1997.42,203 2520.83,203 ; J3.6@2411.74,292.09 cw(c2411.74,243.8) 2445.88,277.94 cw(c2480.02,312.09) J3.6@2431.74,312.09 ; J3.6@2411.74,312.09 2520.83,203 ; J5.6@2611.74,2212.6 2811.14,2412 3241,2412 3668,1985 3668,501 3370,203 2520.83,203 ; J5.6@2611.74,2232.6 ccw(c2611.74,2280.88) 2645.88,2246.74 ccw(c2680.02,2212.6) J5.6@2631.74,2212.6
  Bottom Layer w10: v1@1683,1537 cw(c1683,1524.93) 1691.54,1533.46 cw(c1700.07,1542) v1@1688,1542 ; v1(1683,1542) 1845.9,1379.1 ; v1@1842.36,1310.64 ccw(c1833.83,1319.17) 1845.9,1319.17 ccw(c1857.97,1319.17) v1@1849.43,1310.64 ; v1(1845.9,1051.2) 1911,1116.3 1911,1314 1845.9,1379.1 ; v1@1845.9,1056.2 ccw(c1845.9,1068.27) 1854.43,1059.73 ccw(c1862.97,1051.2) v1@1850.9,1051.2 ; v1(1845.9,1307.1) 1845.9,1379.1 ; J3.6@2394.06,329.76 ccw(c2351.38,372.44) 2411.74,372.44 ccw(c2472.1,372.44) J3.6@2429.42,329.76 ; J3.6@2401.13,322.69 ccw(c2375.53,348.3) 2411.74,348.3 ccw(c2447.95,348.3) J3.6@2422.35,322.69 ; J3.6@2411.74,312.09 2411.74,447.74 2482,518 v1@2482,891 ; v1(2433,1855) v1(2654.34,1860.34) v1@2654.34,1948.34 ; v1@2436.45,1858.62 ccw(c2444.78,1867.36) 2445.07,1855.29 ccw(c2445.36,1843.22) v1@2436.62,1851.55 ; v1@2477.46,890.46 cw(c2466.51,879.51) 2482,879.51 ; v1@2650.72,1863.79 cw(c2641.98,1872.12) 2642.27,1860.05 cw(c2642.57,1847.98) v1@2650.89,1856.72 ; v1@2650.81,1863.88 ccw(c2642.27,1872.41) 2654.34,1872.41 ccw(c2666.41,1872.41) v1@2657.88,1863.88 ; v1@2651.46,1945.46 cw(c2644.52,1938.52) 2654.34,1938.52 ; 2654.34,1935.34 cw(c2668.66,1935.34) v1@2658.54,1945.46 ; v1(3259.5,1458) 3289.07,1458 J9.9@3433.07,1314 J9.9@3444,1314 ; v1@3263.04,1454.46 cw(c3271.57,1445.93) 3271.57,1458 cw(c3271.57,1470.07) v1@3263.04,1461.54 ; J9.9@3408.07,1314 ccw(c3347.72,1314) 3390.39,1356.68 ccw(c3433.07,1399.36) J9.9@3433.07,1339 ; J9.9@3418.07,1314 ccw(c3381.86,1314) 3407.46,1339.61 ccw(c3433.07,1365.21) J9.9@3433.07,1329
  Bottom Layer w15: J1.1@307.09,1362 497.09,1552 v1(992,1552) ; J1.1@307.09,1384.5 ccw(c307.09,1438.82) 345.5,1400.41 ccw(c383.91,1362) J1.1@329.59,1362 ; J2.4@307.09,2163 433.09,2289 J6.1@634,2289 ; J2.4@307.09,2185.5 ccw(c307.09,2239.82) 345.5,2201.41 ccw(c383.91,2163) J2.4@329.59,2163 ; J6.1@618.09,2273.09 ccw(c579.68,2234.68) 579.68,2289 ccw(c579.68,2343.32) J6.1@618.09,2304.91 ; v1(1504,2087) 1878,2087 2087,2296 2528.34,2296 J5.6@2611.74,2212.6 ; 1856.72,2087 cw(c1856.72,2070.72) v1@1868.23,2082.23 ; v1@1870,2086.5 ccw(c1870,2104.61) 1882.8,2091.8 ; J5.6@2589.24,2212.6 ccw(c2534.92,2212.6) 2573.33,2251.01 ccw(c2611.74,2289.42) J5.6@2611.74,2235.1 ; v1(2926.89,851) J7.5@3333,851 ; J7.6@3217.42,835.42 ccw(c3179.82,797.82) 3179.82,851 ccw(c3179.82,904.18) J7.6@3217.42,866.58 ; J7.6@3248.58,835.42 cw(c3286.18,797.82) 3286.18,851 cw(c3286.18,904.18) J7.6@3248.58,866.58 ; J7.5@3317.09,835.09 ccw(c3278.68,796.68) 3278.68,851 ccw(c3278.68,905.32) J7.5@3317.09,866.91
  Bottom Layer w20: J4.1@133.86,1156 207.09,1156 ; J4.1@148,1141.86 cw(c182.14,1107.72) 182.14,1156 cw(c182.14,1204.28) J4.1@148,1170.14 ; J1.1@292.94,1347.86 cw(c258.8,1313.72) 307.09,1313.72 cw(c355.37,1313.72) J1.1@321.23,1347.86 ; J1.1@307.09,1362 307.09,1256 cw(c207.09,1256) 207.09,1156 ; J8.1@821.86,598.14 ccw(c787.72,632.28) 836,632.28 ccw(c884.28,632.28) J8.1@850.14,598.14 ; J8.1@836,584 836,1056 ccw(c736,1056) 736,1156 207.09,1156
  other v1: 328,109 1746,166 1653,192 528,219 278,232 684,689 687,778 55,835 549,1153 2372,1248 920,1644 924,1721 71,1977 2945,1991 3122,1997 1870,2084 3285,2280 1260,2397 3288,2407
BOOT0: J6.5 R10.1 U3.138 | length 4672.3
  Top Layer w10: v1(1156,1487) 1219,1550 v1(1338,1550) ; v1@1156,1492 ccw(c1156,1504.07) 1164.54,1495.54 ccw(c1173.07,1487) v1@1161,1487 ; v1(1175,2148) v1(1318,2148) ; v1@1178.54,2144.46 cw(c1187.07,2135.93) 1187.07,2148 cw(c1187.07,2160.07) v1@1178.54,2151.54 ; v1@1227,1061 cw(c1227,1048.93) 1235.54,1057.46 cw(c1244.07,1066) v1@1232,1066 ; v1(1227,1066) 1254,1039 R10.1@1509,1039 ; v1@1314.46,2144.46 ccw(c1305.93,2135.93) 1305.93,2148 ccw(c1305.93,2160.07) v1@1314.46,2151.54 ; v1@1334.46,1546.46 ccw(c1325.93,1537.93) 1325.93,1550 ccw(c1325.93,1562.07) v1@1334.46,1553.54 ; R10.1@1494.15,1024.15 ccw(c1458.3,988.3) 1458.3,1039 ccw(c1458.3,1089.7) R10.1@1494.15,1053.85 ; R10.1@1501.22,1031.22 ccw(c1482.44,1012.44) 1482.44,1039 ccw(c1482.44,1065.56) R10.1@1501.22,1046.78 ; v1(2326,847) 2507,847 2555.92,895.92 U3.138@2555.92,957.69 ; v1@2329.54,843.46 cw(c2338.07,834.93) 2338.07,847 cw(c2338.07,859.07) v1@2329.54,850.54
  Bottom Layer w10: J6.5@1034,2264 cw(c1034,2203.64) 1076.68,2246.32 cw(c1119.36,2289) J6.5@1059,2289 ; J6.5@1034,2274 cw(c1034,2237.79) 1059.61,2263.39 cw(c1085.21,2289) J6.5@1049,2289 ; J6.5@1034,2289 1338,1985 v1(1338,1550) ; v1@1152.46,1483.46 cw(c1143.93,1474.93) 1156,1474.93 cw(c1168.07,1474.93) v1@1159.54,1483.46 ; v1(1156,1487) 1156,1137 v1(1227,1066) ; v1@1170,2148 ccw(c1157.93,2148) 1166.46,2156.54 ccw(c1175,2165.07) v1@1175,2153 ; v1@1175,2143 cw(c1175,2130.93) 1183.54,2139.46 cw(c1192.07,2148) v1@1180,2148 ; v1@1222,1066 ccw(c1209.93,1066) 1218.46,1074.54 ccw(c1227,1083.07) v1@1227,1071 ; v1@1318,2143 cw(c1318,2130.93) 1326.54,2139.46 cw(c1335.07,2148) v1@1323,2148 ; v1(1318,2148) 1505,1961 1790,1961 2296.71,1454.29 cw(c2226,1383.58) 2301,1449.72 cw(c2226,1383.58) 2326,1383.58 v1(2326,847) ; v1@1334.46,1553.54 ccw(c1325.93,1562.07) 1338,1562.07 ccw(c1350.07,1562.07) v1@1341.54,1553.54 ; v1@2322.46,850.54 ccw(c2313.93,859.07) 2326,859.07 ccw(c2338.07,859.07) v1@2329.54,850.54
BOOT1: R9.1 U3.48 | length 414.3
  Top Layer w10: U3.48@2457.49,1794.31 2457.49,1882.49 2598,2023 R9.1@2606,2023 ; 2553.08,1978.08 cw(c2606,1925.16) R9.1@2606,2000 ; 2570.15,1995.15 cw(c2606,1959.3) R9.1@2606,2010 ; 2577.22,2002.22 ccw(c2558.44,2021) R9.1@2585,2021
BRK_L: J3.9 U3.14 | length 1533.5
  Top Layer w10: v1(2467,1186) 2568.42,1287.42 U3.14@2747.85,1287.42 ; v1@2467,1191 ccw(c2467,1203.07) 2475.54,1194.54 ccw(c2484.07,1186) v1@2472,1186
  Bottom Layer w10: J3.9@2111.74,312.09 2349,549.35 2349,1068 v1(2467,1186) ; J3.9@2111.74,327.09 ccw(c2111.74,363.3) 2137.35,337.69 ccw(c2162.95,312.09) J3.9@2126.74,312.09 ; J3.9@2111.74,337.09 ccw(c2111.74,397.44) 2154.42,354.76 ccw(c2197.1,312.09) J3.9@2136.74,312.09 ; v1@2462,1186 cw(c2449.93,1186) 2458.46,1177.46 cw(c2467,1168.93) v1@2467,1181
BRK_R: J5.9 U3.15 | length 1439.9
  Top Layer w10: U3.15@2747.85,1307.1 2780.9,1307.1 v1(2801,1287) ; v1@2796,1287 ccw(c2783.93,1287) 2792.46,1295.54 ccw(c2801,1304.07) v1@2801,1292
  Bottom Layer w10: v1@2796,1287 ccw(c2783.93,1287) 2792.46,1295.54 ccw(c2801,1304.07) v1@2801,1292 ; v1(2801,1287) 2762,1326 2762,2265 2790,2293 2831.34,2293 J5.9@2911.74,2212.6 ; J5.9@2886.74,2212.6 ccw(c2826.38,2212.6) 2869.06,2255.28 ccw(c2911.74,2297.95) J5.9@2911.74,2237.6 ; J5.9@2896.74,2212.6 ccw(c2860.53,2212.6) 2886.13,2238.2 ccw(c2911.74,2263.81) J5.9@2911.74,2227.6
BT_EN: J10.6 U3.123 | length 748.1
  Top Layer w10: J10.6@1992,587 2160.64,587 ccw(c2160.64,687) 2260.64,687 U3.123@2260.64,957.69 ; J10.6@2002.61,576.39 cw(c2028.21,550.79) 2028.21,587 cw(c2028.21,623.21) J10.6@2002.61,597.61 ; J10.6@2009.68,569.32 cw(c2052.36,526.64) 2052.36,587 cw(c2052.36,647.36) J10.6@2009.68,604.68
BT_STATE: J10.1 U3.118 | length 1106.8
  Top Layer w10: J10.1@1474.32,604.68 ccw(c1431.64,647.36) 1492,647.36 ccw(c1552.36,647.36) J10.1@1509.68,604.68 ; J10.1@1481.39,597.61 ccw(c1455.79,623.21) 1492,623.21 ccw(c1528.21,623.21) J10.1@1502.61,597.61 ; J10.1@1492,587 1492,662 cw(c1592,662) 1592,762 2062.22,762 ccw(c2062.22,862) 2162.22,862 U3.118@2162.22,957.69
DIR_L: J3.7 U3.12 | length 1421.9
  Top Layer w10: J3.7@2294.06,329.76 ccw(c2251.38,372.44) 2311.74,372.44 ccw(c2372.1,372.44) J3.7@2329.42,329.76 ; J3.7@2301.13,322.69 ccw(c2275.53,348.3) 2311.74,348.3 ccw(c2347.95,348.3) J3.7@2322.35,322.69 ; J3.7@2311.74,312.09 2311.74,468.74 v1(2390,547) ; v1@2385,547 cw(c2372.93,547) 2381.46,538.46 cw(c2390,529.93) v1@2390,542 ; v1(2467,1100) 2615.05,1248.05 U3.12@2747.85,1248.05 ; v1@2467,1105 ccw(c2467,1117.07) 2475.54,1108.54 ccw(c2484.07,1100) v1@2472,1100
  Bottom Layer w10: v1@2386.46,550.54 ccw(c2377.93,559.07) 2390,559.07 ccw(c2402.07,559.07) v1@2393.54,550.54 ; v1(2390,547) 2390,1023 v1(2467,1100) ; v1@2462,1100 cw(c2449.93,1100) 2458.46,1091.46 cw(c2467,1082.93) v1@2467,1095
DIR_R: J5.7 U3.13 | length 1270.8
  Top Layer w10: U3.13@2747.85,1267.73 2784,1267.73 2793.84,1257.89 v1(2811,1257.89) ; v1@2807.46,1254.35 ccw(c2798.93,1245.82) 2798.93,1257.89 ccw(c2798.93,1269.96) v1@2807.46,1261.43
  Bottom Layer w10: J5.7@2694.06,2194.92 cw(c2651.39,2152.24) 2711.74,2152.24 cw(c2772.1,2152.24) J5.7@2729.42,2194.92 ; J5.7@2701.13,2201.99 cw(c2675.53,2176.39) 2711.74,2176.39 cw(c2747.95,2176.39) J5.7@2722.35,2201.99 ; J5.7@2711.74,2212.6 2711.74,1326.26 2780.11,1257.89 v1(2811,1257.89) ; v1@2807.46,1254.35 ccw(c2798.93,1245.82) 2798.93,1257.89 ccw(c2798.93,1269.96) v1@2807.46,1261.43
EN_L: J3.8 U3.10 | length 1446.2
  Top Layer w10: v1(2472,1037) v1(2587,1152) ; v1@2472,1042 ccw(c2472,1054.07) 2480.54,1045.54 ccw(c2489.07,1037) v1@2477,1037 ; v1@2582,1152 cw(c2569.93,1152) 2578.46,1143.46 cw(c2587,1134.93) v1@2587,1147 ; v1@2671.68,1208.68 U3.10@2747.85,1208.68 ; v1@2675.54,1205.46 cw(c2683.29,1197.71) 2683.29,1208.68 ; v1@2675.54,1212.54 ccw(c2684.85,1221.85) 2684.85,1208.68
  Bottom Layer w10: J3.8@2211.74,312.09 2443,543.35 2443,1009 2444,1009 v1(2472,1037) ; J3.8@2211.74,327.09 ccw(c2211.74,363.3) 2237.35,337.69 ccw(c2262.95,312.09) J3.8@2226.74,312.09 ; J3.8@2211.74,337.09 ccw(c2211.74,397.44) 2254.42,354.76 ccw(c2297.1,312.09) J3.8@2236.74,312.09 ; v1@2467,1037 cw(c2454.93,1037) 2463.46,1028.46 cw(c2472,1019.93) v1@2472,1032 ; v1(2587,1152) 2644,1209 v1(2672,1209) ; v1@2587,1157 ccw(c2587,1169.07) 2595.54,1160.54 ccw(c2604.07,1152) v1@2592,1152 ; v1@2668.46,1205.46 ccw(c2659.93,1196.93) 2659.93,1209 ccw(c2659.93,1221.07) v1@2668.46,1212.54
EN_R: J5.8 U3.11 | length 1272.3
  Top Layer w10: U3.11@2747.85,1228.36 v1(2811,1228.36) ; v1@2807.46,1224.83 ccw(c2798.93,1216.29) 2798.93,1228.36 ccw(c2798.93,1240.43) v1@2807.46,1231.9
  Bottom Layer w10: J5.8@2794.06,2194.92 cw(c2751.38,2152.24) 2811.74,2152.24 cw(c2872.1,2152.24) J5.8@2829.42,2194.92 ; J5.8@2801.13,2201.99 cw(c2775.53,2176.39) 2811.74,2176.39 cw(c2847.95,2176.39) J5.8@2822.35,2201.99 ; v1(2811,1228.36) 2854,1271.36 2854,1343 2811.74,1385.26 J5.8@2811.74,2212.6 ; v1@2811,1233.36 ccw(c2811,1245.43) 2819.54,1236.9 ccw(c2828.07,1228.36) v1@2816,1228.36
I2C_SCL1: U3.136
I2C_SDA1: U3.137
NetC8_1: C8.1 U1.2 | length 210.2
  Top Layer w15: C8.1@661.5,1940 712,1940 749,1903 U1.2@809,1903 ; C8.1@670.34,1931.16 cw(c691.68,1909.82) 691.68,1940 cw(c691.68,1970.18) C8.1@670.34,1948.84
NetC9_1: C9.1 U1.6 | length 371.2
  Top Layer w15: C9.1@576.5,1607.44 cw(c576.5,1565.19) 606.37,1595.06 ; C9.1@576.5,1624.94 619.44,1582 688,1582 725,1619 725,1659 769,1703 U1.6@809,1703 ; C9.1@589,1619.94 ccw(c607.11,1619.94) C9.1@594.3,1607.13
NetC10_1: C10.1 U2.2 | length 213.2
  Top Layer w15: C10.1@655.6,1439 716,1439 746,1409 U2.2@809,1409 ; C10.1@664.44,1430.16 cw(c685.78,1408.82) 685.78,1439 cw(c685.78,1469.18) C10.1@664.44,1447.84
NetC11_1: C11.1 U2.6 | length 254.4
  Top Layer w10: C11.1@655.5,1130.94 688.94,1130.94 ; C11.1@666.7,1120.96 cw(c688.94,1101.17) 688.94,1130.94 ; C11.1@666.7,1140.91 ccw(c688.94,1160.7) 688.94,1130.94 ; U2.6@785.89,1205.58 ccw(c777.62,1197.31) 777.62,1209 ccw(c777.62,1220.69) U2.6@785.89,1212.42 ; U2.6@809,1209 767,1209 688.94,1130.94
NetC12_1: C12.1 U1.3 | length 372.5
  Top Layer w15: C12.1@576.6,1812.81 cw(c576.6,1792.09) C12.1@591.26,1806.74 ; C12.1@576.6,1830.31 576.6,1821.4 617,1781 700,1781 772,1853 U1.3@809,1853 ; C12.1@589.1,1825.31 ccw(c628.74,1825.31) 600.71,1797.29 ; 755.76,1836.76 cw(c789.31,1803.2) U1.3@789.31,1850.66
NetC12_2: C12.2 U1.1 | length 327
  Top Layer w15: C12.2@661.6,1830.31 678.31,1830.31 v1(723,1875) ; C12.2@661.6,1832.81 ccw(c661.6,1879.18) 694.39,1846.39 ; C12.2@661.6,1847.81 ccw(c661.6,1930.4) v1@720,1872 ; v1(754,1953) U1.1@809,1953
  Bottom Layer w15: v1(723,1875) 723,1922 v1(754,1953)
NetC13_1: C13.1 U1.4 | length 328
  Top Layer w15: C13.1@661.5,1727.62 683.62,1727.62 ; C13.1@661.5,1730.12 ccw(c661.5,1789.57) 703.54,1747.54 ; C13.1@661.5,1745.12 ccw(c661.5,1840.79) 729.14,1773.14 ; C13.1@672.21,1721.17 cw(c683.62,1714.3) 683.62,1727.62 ; C13.1@672.21,1734.08 ccw(c683.62,1740.95) 683.62,1727.62 ; U1.4@809,1803 759,1803 683.62,1727.62
NetC13_2: C13.2 U1.5 | length 360.5
  Top Layer w15: C13.2@576.5,1710.12 cw(c576.5,1667.88) 606.37,1697.75 ; C13.2@576.5,1727.62 616.12,1688 707,1688 772,1753 U1.5@809,1753 ; C13.2@589,1722.62 ccw(c607.11,1722.62) C13.2@594.3,1709.82 ; 755.76,1736.76 cw(c789.31,1703.2) U1.5@789.31,1750.66
NetC14_1: C14.1 U2.3 | length 210.3
  Top Layer w15: C14.1@655.5,1336.31 722.31,1336.31 745,1359 U2.3@809,1359 ; C14.1@664.34,1327.47 cw(c685.68,1306.13) 685.68,1336.31 cw(c685.68,1366.49) C14.1@664.34,1345.15
NetC14_2: C14.2 U2.1 | length 352.5
  Top Layer w15: C14.2@570.5,1336.31 624.19,1390 v1(705,1390) ; C14.2@570.5,1353.81 ccw(c570.5,1396.06) 600.37,1366.19 ; C14.2@583,1341.31 cw(c601.11,1341.31) C14.2@588.3,1354.12 ; v1(747,1459) U2.1@809,1459
  Bottom Layer w15: v1(705,1390) 705,1417 v1(747,1459)
NetC15_1: C15.1 U2.4 | length 232.1
  Top Layer w15: C15.1@655.5,1233.62 694.62,1233.62 770,1309 U2.4@809,1309 ; C15.1@664.34,1224.79 cw(c685.68,1203.45) 685.68,1233.62 cw(c685.68,1263.8) C15.1@664.34,1242.46
NetC15_2: C15.2 U2.5 | length 337.5
  Top Layer w15: C15.2@570.5,1216.12 cw(c570.5,1173.88) 600.37,1203.75 ; C15.2@570.5,1233.62 620.12,1184 690,1184 765,1259 U2.5@809,1259 ; C15.2@583,1228.62 ccw(c601.11,1228.62) C15.2@588.3,1215.82
NetD1_1: D1.1 R12.2 | length 455.5
  Top Layer w10: D1.1@1741.82,2343.32 cw(c1699.14,2300.64) 1759.5,2300.64 cw(c1819.86,2300.64) D1.1@1777.18,2343.32 ; D1.1@1748.89,2350.39 cw(c1723.29,2324.79) 1759.5,2324.79 cw(c1795.71,2324.79) D1.1@1770.11,2350.39 ; 1759.5,2271.01 ccw(c1808.01,2271.01) R12.2@1773.71,2236.71 ; 1759.5,2295.15 ccw(c1832.15,2295.15) R12.2@1780.78,2243.78 ; 1759.5,2319.29 ccw(c1856.29,2319.29) R12.2@1787.85,2250.85 ; D1.1@1759.5,2361 1759.5,2247.5 R12.2@1773,2234
NetD2_1: D2.1 R13.2 | length 265
  Top Layer w20: D2.1@1466.36,2346.86 cw(c1423.77,2304.27) 1484,2304.27 ; R13.2@1472.69,2247.31 ccw(c1445.37,2274.63) 1484,2274.63 ccw(c1522.63,2274.63) R13.2@1495.31,2247.31 ; D2.1@1480.5,2361 1484,2357.5 R13.2@1484,2234 ; 1484,2321.17 cw(c1520.33,2321.17) D2.1@1494.64,2346.86
NetR15_1: R15.1 U1.11 | length 311.8
  Top Layer w15: U1.11@1034,1703 1089,1703 1215.98,1829.98 R15.1@1223,1829.98 ; 1176.02,1790.02 cw(c1223,1743.04) R15.1@1223,1809.48 ; R15.1@1197.8,1811.8 ccw(c1181.62,1827.98) R15.1@1204.5,1827.98
NetR16_1: R16.1 U1.12 | length 355
  Top Layer w15: U1.12@1034,1753 1081,1753 1151,1823 1151,1860 R16.1@1223,1932 ; 1188,1897 cw(c1223,1862.01) R16.1@1223,1911.5 ; 1192.83,1901.83 ccw(c1164.67,1930) R16.1@1204.5,1930
NetR17_1: R17.1 U1.10 | length 290.2
  Top Layer w15: U1.10@1034,1653 1148.04,1653 R17.1@1223,1727.96 ; 1188,1692.96 cw(c1223,1657.97) R17.1@1223,1707.46 ; 1192.83,1697.79 ccw(c1164.67,1725.96) R17.1@1204.5,1725.96
NetR18_1: R18.1 U1.9 | length 354.4
  Top Layer w15: U1.9@1034,1603 R18.1@1200.06,1603 ; 1127.79,1603 ccw(c1127.79,1719.15) R18.1@1209.92,1637.02 ; 1164,1603 ccw(c1164,1682.93) R18.1@1220.53,1626.41 ; R18.1@1200.22,1603 ccw(c1200.22,1646.72) R18.1@1231.13,1615.81